# Altium PCB Power_Board_DRV8323.PcbDoc
Units mil, origin at the board's own origin, x right, y up, seen from the top; angles counter-clockwise.
Board outline 2748.03 x 2216.54 mil, 2 copper layers (Top Layer, Bottom Layer); 61 components, 46 nets, 232 pads, 128 vias.
Unrouted connection lines stored in the file: 44.
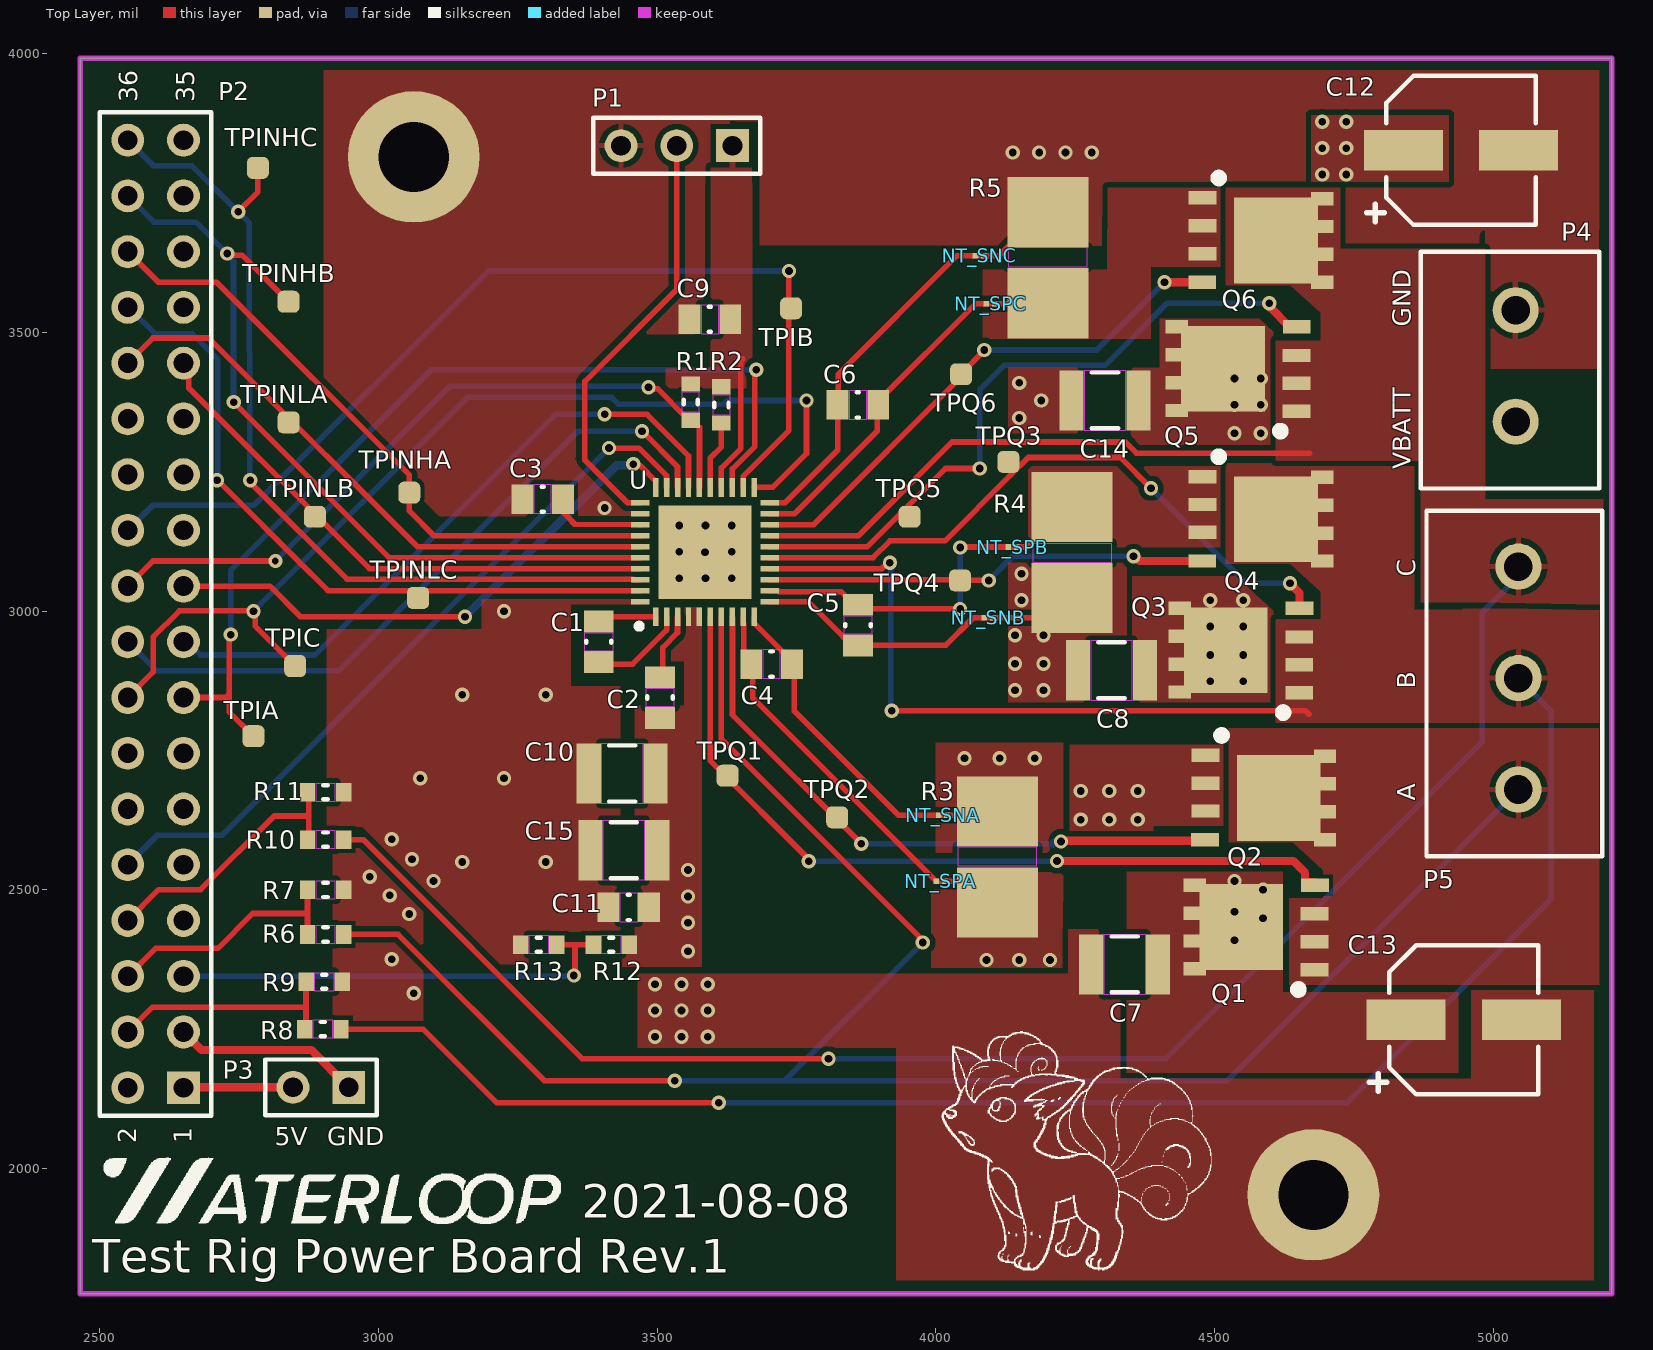
[diagram p0: Top Layer view]
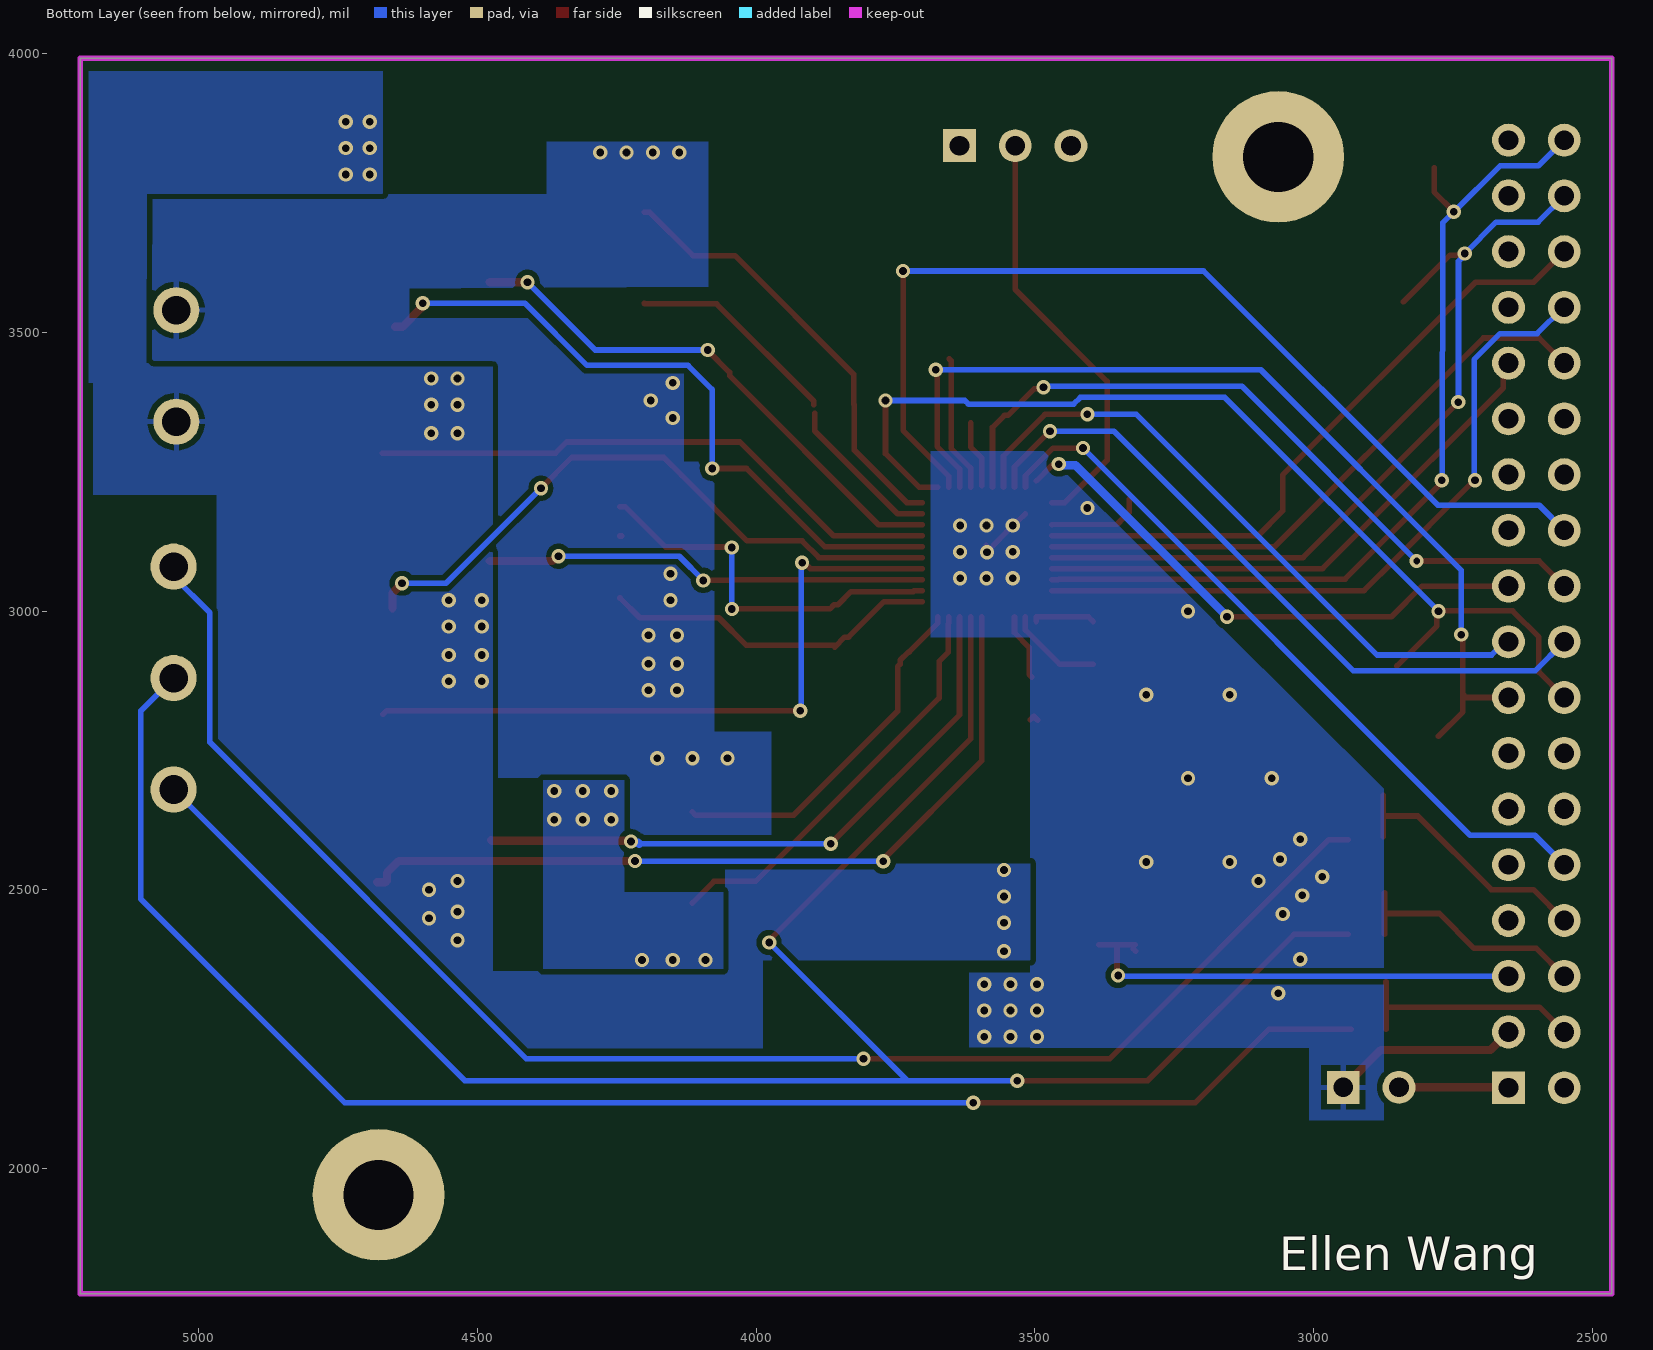
[diagram p1: Bottom Layer view, seen from below]
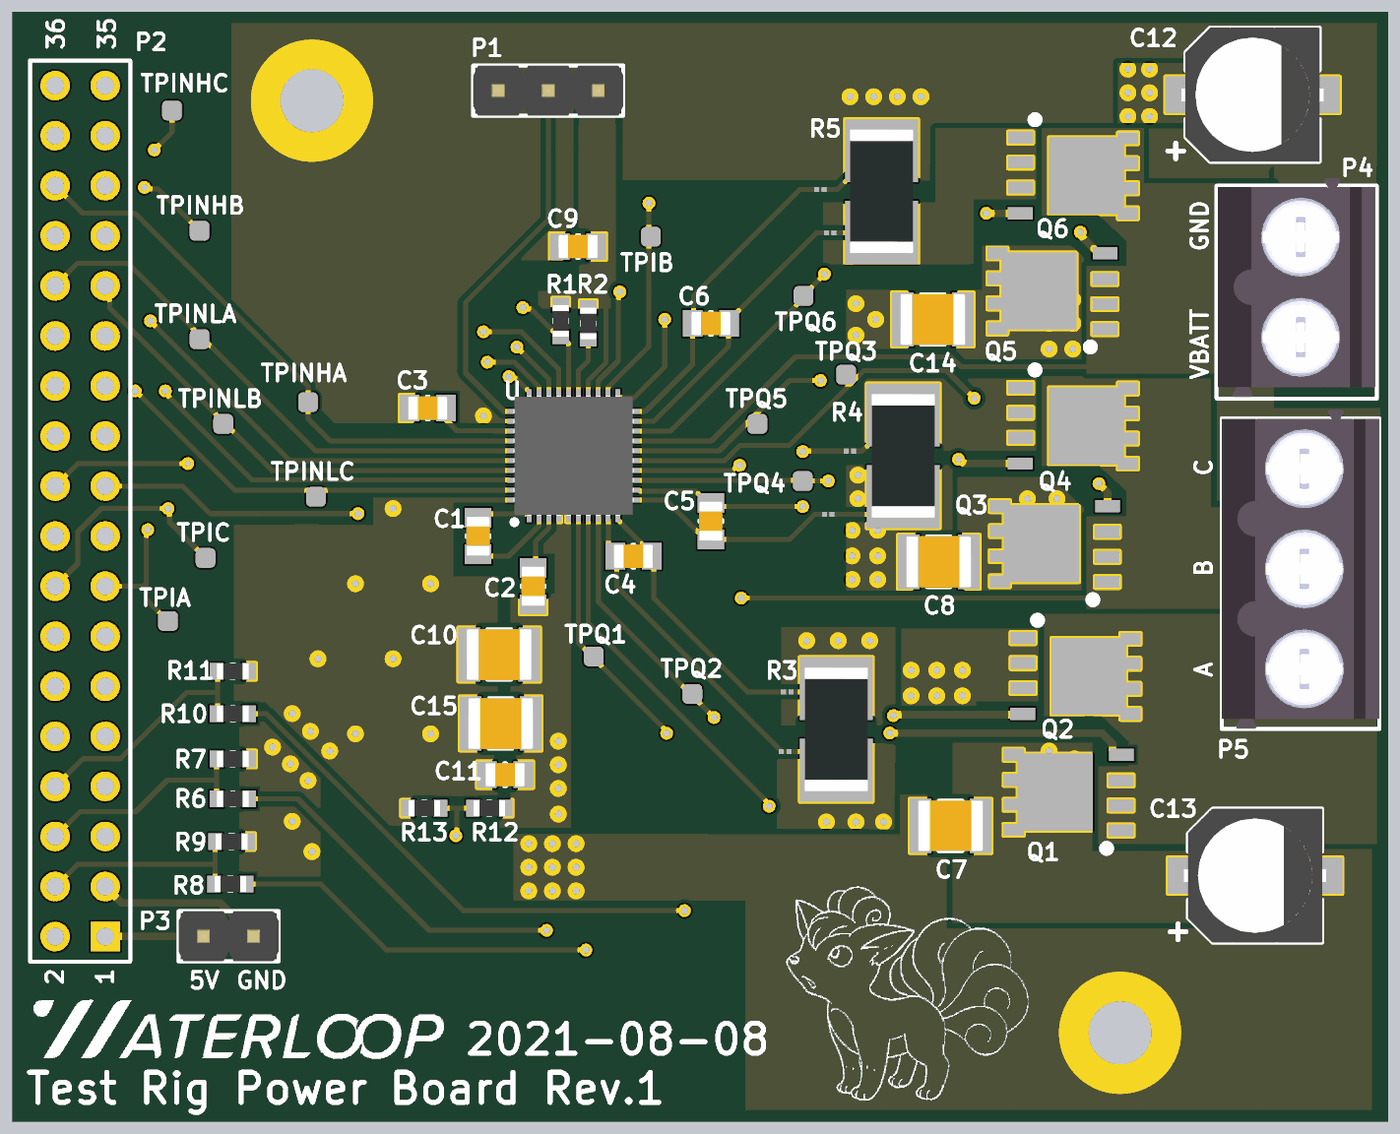
[diagram p2: 3D render of the assembled board from above, using the file's embedded part models]

## Layer stack, top to bottom
Top Solder: solder mask 0.4, Solder Resist, Dk 3.5
Top Layer: signal copper 1.4
Dielectric 1: dielectric 12.6, FR-4, Dk 4.8
Bottom Layer: signal copper 1.4
Bottom Solder: solder mask 0.4, Solder Resist, Dk 3.5

## Board outline
2464.57,1775.59 2464.57,3992.13 5212.6,3992.13 5212.6,1775.59

## Design rules (kind name [scope] priority, off if disabled: settings)
Clearance [All] p1: gap=10 ignorepadtopadclearanceinfootprint=FALSE except(0: Arc-Hole Track-Hole SMDPad-Hole THPad-Hole Via-Hole Fill-Hole Poly-Hole Region-Hole Text-Hole; 5: Arc-Arc Arc-Track Track-Track SMDPad-SMDPad; 7.87: Arc-SMDPad Track-SMDPad SMDPad-Fill SMDPad-Poly SMDPad-Region)
PolygonConnect PolygonConnect_11 [All vs IsNamedPolygon('GND_L02_P186')] p1: connectstyle=Direct reliefconductorwidth=10 reliefentries=4 polygonreliefangle="90 Angle" airgapwidth=10
PolygonConnect PolygonConnect_10 [All vs IsNamedPolygon('Bottom Layer-GND')] p2: connectstyle=Direct reliefconductorwidth=10 reliefentries=4 polygonreliefangle="90 Angle" airgapwidth=10
PolygonConnect PolygonConnect_9 [All vs IsNamedPolygon('VBATT_L02_P184')] p3: connectstyle=Direct reliefconductorwidth=10 reliefentries=4 polygonreliefangle="90 Angle" airgapwidth=10
PolygonConnect PolygonConnect_8 [All vs IsNamedPolygon('GND_L02_P183')] p4: connectstyle=Direct reliefconductorwidth=10 reliefentries=4 polygonreliefangle="90 Angle" airgapwidth=10
PolygonConnect PolygonConnect_7 [All vs IsNamedPolygon('GND_L01_P180')] p5: connectstyle=Direct reliefconductorwidth=10 reliefentries=4 polygonreliefangle="90 Angle" airgapwidth=10
PolygonConnect PolygonConnect_6 [All vs IsNamedPolygon('GND_L02_P181')] p6: connectstyle=Direct reliefconductorwidth=10 reliefentries=4 polygonreliefangle="90 Angle" airgapwidth=10
PolygonConnect PolygonConnect_5 [All vs IsNamedPolygon('NETNT_SPA_2_L02_P179')] p7: connectstyle=Direct reliefconductorwidth=10 reliefentries=4 polygonreliefangle="90 Angle" airgapwidth=10
PolygonConnect PolygonConnect_4 [All vs IsNamedPolygon('GND_L02_P177')] p8: connectstyle=Direct reliefconductorwidth=10 reliefentries=4 polygonreliefangle="90 Angle" airgapwidth=10
PolygonConnect PolygonConnect_3 [All vs IsNamedPolygon('NETNT_SPA_2_L01_P178')] p9: connectstyle=Direct reliefconductorwidth=10 reliefentries=4 polygonreliefangle="90 Angle" airgapwidth=10
PolygonConnect PolygonConnect_2 [All vs IsNamedPolygon('VBATT_L01_P178')] p10: connectstyle=Direct reliefconductorwidth=10 reliefentries=4 polygonreliefangle="90 Angle" airgapwidth=10
PolygonConnect PolygonConnect_1 [All vs IsNamedPolygon('3V3_L01_P174') Or IsNamedPolygon('GND_L01_P151') Or IsNamedPolygon('GND_L01_P155') Or IsNamedPolygon('GND_L01_P159') Or IsNamedPolygon('GND_L01_P163') Or IsNamedPolygon('GND_L01_P173') Or IsNamedPolygon('NETNT_SPA_2_L01_P156') Or IsNamedPolygon('NETNT_SPB_2_L01_P152') Or IsNamedPolygon('NETNT_SPC_2_L01_P148') Or IsNamedPolygon('PHASE_A_L01_P157') Or IsNamedPolygon('PHASE_B_L01_P153') Or IsNamedPolygon('PHASE_C_L01_P149') Or IsNamedPolygon('SPB_L01_P113') Or IsNamedPolygon('Top Layer-GND') Or IsNamedPolygon('Top Layer-GND 1') Or IsNamedPolygon('Top Layer-VBATT') Or IsNamedPolygon('Top Layer-VBATT 1') Or IsNamedPolygon('VBATT_L01_P150') Or IsNamedPolygon('VBATT_L01_P154') Or IsNamedPolygon('VBATT_L01_P162') Or IsNamedPolygon('VBATT_L01_P172') Or IsNamedPolygon('GND_L02_P177') Or IsNamedPolygon('VBATT_L02_P176')] p11: connectstyle=Direct reliefconductorwidth=10 reliefentries=4 polygonreliefangle="90 Angle" airgapwidth=10
PolygonConnect [All] p12: connectstyle=Relief reliefconductorwidth=10 reliefentries=4 polygonreliefangle="90 Angle" airgapwidth=10
RoutingVias [All] p1: holewidth=19.68 width=39.37 viastyle="Through Hole" minholewidth=7.87 minwidth=23.62 maxholewidth=28 maxwidth=50
SilkToSolderMaskClearance [IsPad] p1: minsilkscreentomaskgap=5.91 clearancetoexposedcopper=TRUE
SolderMaskExpansion [All] p1: expansion=4 istentingtop=FALSE
Width [All] p1: maxlimit=15 minlimit=10 preferedwidth=15 toplayer_prefwidth=10 minimp=50.000000 maximp=50.000000 favimp=50.000000
29 further rules are at their usual default settings.

## Components (designator, comment, footprint, x,y, rotation, side; value= is the part's Value field where it differs from the comment)
C1 "Capacitor - Nonpolarized" "0805 - CAPACITOR"#1 3395,2945 r90 top value=47nF
C2 "Capacitor - Nonpolarized" "0805 - CAPACITOR"#1 3505,2845 r270 top value=1uF
C3 "Capacitor - Nonpolarized" "0805 - CAPACITOR"#1 3294.29,3200.79 r0 top value=1uF
C4 "Capacitor - Nonpolarized" "0805 - CAPACITOR"#1 3705,2905 r180 top value=1nF
C5 "Capacitor - Nonpolarized" "0805 - CAPACITOR"#1 3860,2975 r90 top value=1nF
C6 "Capacitor - Nonpolarized" "0805 - CAPACITOR"#1 3860,3370 r0 top value=1nF
C7 "Capacitor - Nonpolarized" "1210 - Capacitor" 4338.58,2366.14 r180 top value=4.7uF
C8 "Capacitor - Nonpolarized" "1210 - Capacitor" 4314.96,2893.7 r0 top value=4.7uF
C9 "Capacitor - Nonpolarized" "0805 - CAPACITOR"#1 3594.49,3523.62 r180 top value=0.1uF
C10 "Capacitor - Nonpolarized" "1210 - Capacitor" 3437.01,2708.66 r180 top value=4.7uF
C11 "Capacitor - Nonpolarized" "0805 - CAPACITOR"#2 3448.82,2468.5 r180 top value=0.1uF
C12 "Capacitor - Polarized" "OCVZ0606 - CAPACITOR" 4941.93,3826.77 r0 top value=330uF
C13 "Capacitor - Polarized" "OCVZ0606 - CAPACITOR" 4946.75,2266.78 r0 top value=330uF
C14 "Capacitor - Nonpolarized" "1210 - Capacitor" 4303.15,3377.95 r0 top value=4.7uF
C15 "Capacitor - Nonpolarized" "1210 - Capacitor" 3439.96,2570.87 r0 top value=4.7uF
NT_SNA "NetTie" "Net Tie" 4004.68,2633.86 r90 top net-tie
NT_SNB "NetTie" "NET TIE" 4086.61,2988.19 r90 top net-tie
NT_SNC "NetTie" "NET TIE" 4070.87,3637.8 r90 top net-tie
NT_SPA "NetTie" "NET TIE" 4000.72,2515.03 r90 top net-tie
NT_SPB "NetTie" "Net Tie" 4130,3115 r90 top net-tie
NT_SPC "NetTie" "Net Tie" 4090.55,3551.18 r90 top net-tie
P1 "1x3 Header" HDR1X3 3635,3835 r180 top
P2 "Header 18X2" HDR2X18 2650,2145 r90 top
P3 "1x2 Header" HDR1X2 2946.46,2145.67 r180 top
P4 "1760510000" 1760510000 5040,3340 r90 top
P5 "1760520000" 1760520000 5045,2680 r90 top
Q1 "MOSFET-N" "POWERPAK® SO-8" 4679.72,2508.27 r180 top
Q2 "MOSFET-N" "POWERPAK® SO-8" 4482.72,2590 r0 top
Q3 "MOSFET-N" "POWERPAK® SO-8" 4652.28,3005 r180 top
Q4 "MOSFET-N" "POWERPAK® SO-8" 4477.72,3090 r0 top
Q5 "MOSFET-N" "POWERPAK® SO-8" 4647.28,3510 r180 top
Q6 "MOSFET-N" "POWERPAK® SO-8" 4477.72,3590 r0 top
R1 "Resistor" "0603 - RESISTOR" 3560,3375 r90 top value=4.7k
R2 "Resistor" "0603 - RESISTOR" 3615,3370 r90 top value=4.7k
R3 "Resistor" "2512 - RESISTOR" 4110.24,2559.06 r270 top value=1m
R4 "Resistor" "2512 - RESISTOR" 4244.09,3105.31 r90 top value=1m
R5 "Resistor" "2512 - RESISTOR" 4200.79,3633.86 r270 top value=1m
R6 "Resistor" "0603 - RESISTOR" 2905,2420 r180 top value=91k
R7 "Resistor" "0603 - RESISTOR" 2905,2500 r0 top value=5.6k
R8 "Resistor" "0603 - RESISTOR" 2900,2250 r180 top value=91k
R9 "Resistor" "0603 - RESISTOR" 2902.52,2335 r0 top value=5.6k
R10 "Resistor" "0603 - RESISTOR" 2905,2590 r180 top value=91k
R11 "Resistor" "0603 - RESISTOR" 2905,2675 r0 top value=5.6k
R12 "Resistor" "0603 - RESISTOR" 3417.32,2401.57 r180 top value=91k
R13 "Resistor" "0603 - RESISTOR" 3287.4,2401.57 r180 top value=5.6k
TPIA "Test Point" "Test Point"#1 2775.59,2775.59 r90 top
TPIB "Test Point" "Test Point"#1 3740.16,3543.31 r90 top
TPIC "Test Point" "Test Point"#1 2850.39,2901.57 r90 top
TPINHA "Test Point" "Test Point"#1 3055.12,3212.6 r90 top
TPINHB "Test Point" "Test Point"#1 2838.58,3555.12 r90 top
TPINHC "Test Point" "Test Point"#2 2783.46,3809.72 r90 top
TPINLA "Test Point" "Test Point"#1 2838.58,3338.58 r90 top
TPINLB "Test Point" "Test Point"#1 2885.83,3169.29 r90 top
TPINLC "Test Point" "Test Point"#1 3070.87,3023.62 r90 top
TPQ1 "Test Point" "Test Point"#1 3625.98,2704.72 r90 top
TPQ2 "Test Point" "Test Point"#1 3822.83,2629.92 r90 top
TPQ3 "Test Point" "Test Point"#1 4129.92,3267.72 r90 top
TPQ4 "Test Point" "Test Point"#1 4043.31,3055.12 r90 top
TPQ5 "Test Point" "Test Point"#1 3952.76,3169.29 r90 top
TPQ6 "Test Point" "Test Point"#1 4045,3425 r90 top
U "DRV8323SRTAT" DRV8323SRTAT 3585.55,3105.79 r90 top

## Footprints (in the part's own frame and the unit in brackets; to place one, negate y for a bottom-side part, rotate by r counter-clockwise, add the part's x,y. Pads: shape width x height; smd on the part's side, far side on the other; paste and mask are expansions set on the pad)
"0603 - RESISTOR" [mm] "0603 Chip Resistor - IPC Medium Density"
  rect 0.7x0.85 smd: 1(-0.825,0) 2(0.825,0)
  Top Layer keep-out region: -0.45,0.4 -0.45,-0.4 0.45,-0.4 0.45,0.4
  silkscreen extent -0.1,-0.33 0.1,0.33, body extent -0.8,-0.4 0.8,0.4, height 0.45
"0805 - CAPACITOR"#1 [mm] "0805 Chip Capacitor - IPC Medium Density"
  rect 1x1.35 smd: 1(-0.925,0) 2(0.925,0)
  Top Layer keep-out region: -0.4,0.65 -0.4,-0.65 0.4,-0.65 0.4,0.65
  silkscreen extent -0.05,-0.58 0.05,0.58, body extent -1,-0.6 1,0.6, height 1.2
"0805 - CAPACITOR"#2 [mm] "0805 Chip Capacitor - IPC Medium Density"
  rect 1x1.35 smd: 2(0.925,0) ""(-0.925,0)
  Top Layer keep-out region: -0.4,0.65 -0.4,-0.65 0.4,-0.65 0.4,0.65
  silkscreen extent -0.05,-0.58 0.05,0.58, body extent -1,-0.6 1,0.6, height 1.2
"1210 - Capacitor" [mm] "1210 Chip Capacitor - IPC Medium Density"
  rect 1.1x2.75 smd: 1(-1.525,0) 2(1.525,0)
  Top Layer keep-out region: -0.95,1.35 -0.95,-1.35 0.95,-1.35 0.95,1.35
  silkscreen extent -0.6,-1.27 0.6,1.28, body extent -1.65,-1.3 1.65,1.3, height 1.6
"2512 - RESISTOR" [mm]
  rect 3.2x3.7 smd: 1(-2.075,0) 2(2.075,0)
  Top Layer keep-out region: -0.45,1.8 -0.45,-1.8 0.4,-1.8 0.4,1.8
  body extent -3.15,-1.6 3.15,1.6, height 0.6
1760510000 [mm] "5.08mm pitch screw connector"
  round 2.1 hole 1.3: 1(0,0) 2(5.08,0)
  silkscreen extent -3.05,-3.81 7.75,4.32, body extent -2.98,-3.75 8.13,4.25, height 10
1760520000 [mm] "5.08mm pitch screw connector"
  round 2.1 hole 1.3: 1(0,0) 2(5.08,0) 3(10.16,0)
  silkscreen extent -3.05,-3.81 12.7,4.19, body extent -3.05,-3.81 13.14,4.19, height 10
DRV8323SRTAT [mm]
  rect 0.85x0.25 smd: 1(-2.95,2.25) 2(-2.95,1.75) 3(-2.95,1.25) 4(-2.95,0.75) 5(-2.95,0.25) 6(-2.95,-0.25) 7(-2.95,-0.75) 8(-2.95,-1.25) 9(-2.95,-1.75) 10(-2.95,-2.25) 21(2.95,-2.25) 22(2.95,-1.75) 23(2.95,-1.25) 24(2.95,-0.75) 25(2.95,-0.25) 26(2.95,0.25) 27(2.95,0.75) 28(2.95,1.25) 29(2.95,1.75) 30(2.95,2.25)
  rect 0.25x0.85 smd: 11(-2.25,-2.95) 12(-1.75,-2.95) 13(-1.25,-2.95) 14(-0.75,-2.95) 15(-0.25,-2.95) 16(0.25,-2.95) 17(0.75,-2.95) 18(1.25,-2.95) 19(1.75,-2.95) 20(2.25,-2.95) 31(2.25,2.95) 32(1.75,2.95) 33(1.25,2.95) 34(0.75,2.95) 35(0.25,2.95) 36(-0.25,2.95) 37(-0.75,2.95) 38(-1.25,2.95) 39(-1.75,2.95) 40(-2.25,2.95)
  rect 4.25x4.25 smd: 41(0,0)
  silkscreen extent -3.5,2.87 -3.25,3.12, body extent -3.05,-3.05 3.05,3.05, height 0.8
HDR1X2 [mm] "Connector; Header; 2 Position"
  rect 1.5x1.5 hole 0.9: 1(0,0)
  round 1.5 hole 0.9: 2(2.54,0)
  silkscreen extent -1.27,-1.27 3.81,1.27, body extent -1.27,-1.27 3.81,1.27, height 8.54
HDR1X3 [mm] "Connector; Header; 3 Position"
  rect 1.5x1.5 hole 0.9: 1(0,0)
  round 1.5 hole 0.9: 2(2.54,0) 3(5.08,0)
  silkscreen extent -1.27,-1.27 6.35,1.27, body extent -1.27,-1.27 6.35,1.27, height 8.54
HDR2X18 [mm] "Connector; Header; 18x2 Position"
  rect 1.5x1.5 hole 0.9: 1(0,0)
  round 1.5 hole 0.9: 2(0,2.54) 3(2.54,0) 4(2.54,2.54) 5(5.08,0) 6(5.08,2.54) 7(7.62,0) 8(7.62,2.54) 9(10.16,0) 10(10.16,2.54) 11(12.7,0) 12(12.7,2.54) 13(15.24,0) 14(15.24,2.54) 15(17.78,0) 16(17.78,2.54) 17(20.32,0) 18(20.32,2.54) 19(22.86,0) 20(22.86,2.54) 21(25.4,0) 22(25.4,2.54) 23(27.94,0) 24(27.94,2.54) 25(30.48,0) 26(30.48,2.54) 27(33.02,0) 28(33.02,2.54) 29(35.56,0) 30(35.56,2.54) 31(38.1,0) 32(38.1,2.54) 33(40.64,0) 34(40.64,2.54) 35(43.18,0) 36(43.18,2.54)
  silkscreen extent -1.27,-1.27 44.45,3.81
"Net Tie" [mil] "General Net TIe"
  rect 10x10 smd mask+0: 1(0,0) 2(0,-15)
  Top Layer lines w10: 0,0 0,-15
"NET TIE" [mil] "General Net TIe"
  rect 10x10 smd mask+0: 1(0,0) 2(0,-15)
  Top Layer lines w10: 0,0 0,-15
"OCVZ0606 - CAPACITOR" [mm] "Aluminum Electrolytic Capacitor, Body 6.60x6.60x6.00mm, IPC Low Density"
  rect 3.6x1.85 smd: 1(-2.625,0) 2(2.625,0)
  silkscreen extent -4.3,-3.4 3.4,3.4, body extent -3.6,-3.4 3.6,3.4, height 6
"POWERPAK® SO-8" [mm]
  rect 1.27x0.61 smd: 1(0,0) 3(0.017,3.845) 3(0.017,2.575) 3(0.017,1.305)
  rect 3.81x3.91 smd: 2(3.36,1.905)
  rect 1.02x0.61 smd: 2(5.465,3.81) 2(5.465,0) 2(5.465,0) 2(5.465,1.27) 2(5.465,2.54)
  silkscreen extent 0.57,4.57 0.93,4.93
"Test Point"#1 [mm] "Test Point"
  rrect50% 1x1 smd: 1(0,0)
"Test Point"#2 [mm] "Test Point"
  rrect50% 1x1 smd: 1(-0.367,0)

## Part data
C1: "Nonpolarized Capacitor", Manufacturer=YAGEO, Manufacturer Part Number=CC0805KKX7R0BB473, Rating=100V, Supplier Part Number=311-1876-1-ND, Supplier=Digikey
C2 C3: "Nonpolarized Capacitor", Manufacturer=YAGEO, Manufacturer Part Number=CC0805KKX7R7BB105, Rating=16V, Supplier Part Number=311-1365-1-ND, Supplier=Digikey
C4 C5 C6: "Nonpolarized Capacitor", Manufacturer=YAGEO, Manufacturer Part Number=CC0805KRX7R0BB102, Rating=100V, Supplier Part Number=311-1472-1-ND, Supplier=Digikey
C7 C8 C10 C14 C15: "Nonpolarized Capacitor", Manufacturer="Taiyo Yuden", Manufacturer Part Number=HMK325C7475KN-TE, Rating=100V, Supplier Part Number=587-5038-1-ND, Supplier=Digikey
C9 C11: "Nonpolarized Capacitor", Manufacturer="Samsung Electro-Mechanics", Manufacturer Part Number=CL21B104KCFWPNE, Rating=100V, Supplier Part Number=1276-6733-1-ND, Supplier=Digikey
C12 C13: "Polarized Capacitor", Rating=100V
NT_SNA NT_SNB NT_SNC NT_SPA NT_SPB NT_SPC: library part "Net Tie"
P1: "1x3 Pin Header"
P2: "Header, 18-Pin, Dual row", LatestRevisionDate=17-Jul-2002, LatestRevisionNote="Re-released for DXP Platform.", Publisher="Altium Limited"
P3: "1x2 Pin Header"
P4: "1x2 Screw Terminal Block", Manufacturer=Weidmüller, Supplier Part Number=281-1882-ND, ComponentLink1Description=Datasheet, ComponentLink1URL=https://media.digikey.com/pdf/Data%20Sheets/Weidmuller%20PDFs/1760510000.pdf, Manufacturer Part Number=1760510000, Supplier=Digikey
P5: "1x3 Screw Terminal Block", Manufacturer=Weidmüller, Supplier Part Number=281-1883-ND, ComponentLink1Description=Datasheet, ComponentLink1URL=https://media.digikey.com/pdf/Data%20Sheets/Weidmuller%20PDFs/1760520000.pdf, Manufacturer Part Number=1760520000, Supplier=Digikey
Q1 Q2 Q3 Q4 Q5 Q6: "N-Channel MOSFET", Rating=100V, Supplier Part Number=SiR846DP
R1 R2: Manufacturer=YAGEO, Manufacturer Part Number=RC0603FR-074K7L, Supplier Part Number=311-4.70KHRCT-ND, Supplier=Digikey
R3 R4 R5: Manufacturer=Riedon, Manufacturer Part Number=CSR2512C0R001F, Rating=3W, Supplier Part Number=696-1185-1-ND, Tolerance=1%, Supplier=Digikey
R6 R8 R10 R12: Manufacturer=YAGEO, Manufacturer Part Number=RC0603FR-0791KL, Supplier Part Number=311-91.0KHRCT-ND, Tolerance=1%, Supplier=Digikey
R7 R9 R11 R13: Manufacturer=YAGEO, Manufacturer Part Number=RC0603FR-075K6L, Supplier Part Number=311-5.60KHRCT-ND, Tolerance=1%, Supplier=Digikey
U: "Multiphase Motor Driver Power MOSFET SPI", Manufacturer="Texas Instruments", Supplier Part Number=296-47095-1-ND, ComponentLink1Description=Datasheet, ComponentLink1URL=https://www.ti.com/lit/ds/symlink/drv8323.pdf?HQS=dis-dk-null-digikeymode-dsf-pf-null-wwe&ts=1623708117864, Manufacturer Part Number=DRV8323SRTAT, Supplier=Digikey

## Free pads (board coordinates)
  round 236.22 hole 125.98: 4(3062.99,3814.96) 4(4677.17,1952.76)

## Via types
v1: diameter 25.59, hole 13.78, Top Layer to Bottom Layer, 127 vias
v2: diameter 25.59, hole 11.81, Top Layer to Bottom Layer, 1 vias

## Nets (pads, with @x,y where several pads share a name; then routed paths per layer and width w, separated by ;. In a path a pad name is that pad's centre, name@x,y a point inside that pad or via, vN(x,y) a via of type N, cw(c..) or ccw(c..) an arc to the next point about the centre after c; other vN are vias at no path point)
3V3: C9.1 P1.1 R1.2 R2.2 U.24 | length 246.8
  Top Layer w10: U.24 3615.08,3256.87 3650,3291.79 3650,3449.21 3653.54,3452.76
5V: P2.1 P3.2 | length 195.8
  Top Layer w15: P2.1@2650.67,2145.67 P3.2
CAL: P1.2 U.31 | length 763.7
  Top Layer w10: U.31 3446.32,3194.37 3370,3270.69 3370,3412.1 3535,3577.1 P1.2
CS_DRIVER: P2.10 U.29 | length 1318
  Top Layer w10: v1(3413.39,3292.54) 3467.24,3292.54 3516.57,3243.21 3516.57,3222.01 U.29
  Bottom Layer w10: P2.10 2602.97,2597.97 2718.82,2597.97 v1(3413.39,3292.54)
DVDD: C3.2 U.33 | length 171.2
  Top Layer w10: C3.2 3330.54,3177.57 3351.94,3155.86 U.33
EN: P2.19 U.30 | length 995.6
  Top Layer w10: P2.19 2805,3045 2860,2990 v1(3155,2990) ; v1(3456.69,3263.78) 3459.68,3260.8 3469.75,3260.8 U.30@3496.89,3233.66
  Bottom Layer w15: v1(3155,2990) 3426.75,3261.75 3454.67,3261.75 v1(3456.69,3263.78)
GHA: Q1.1 TPQ1.1 U.6 | length 1442.8
  Top Layer w10: U.6 3595.39,2731.38 v1@3773.62,2553.15
  Top Layer w15: v1(4217.13,2551.78) 4641.11,2551.78 4662.03,2530.86 4662.03,2516.52 4665.18,2513.36 Q1.1@4679.53,2513.36
  Bottom Layer w10: v1@3771.95,2551.48 v1@4216.83,2551.48
  Bottom Layer w15: v1(3771.65,2551.18) v1@3771.95,2551.48 ; v1@4216.83,2551.48 v1(4217.13,2551.78)
GHB: Q3.1 TPQ3.1 U.15 | length 1153.3
  Top Layer w10: U.15 3887.28,3095.94 3917.32,3125.98 3966.65,3125.98 4015.98,3125.98 4133.98,3243.98 4165.59,3275.59 4330.71,3275.59 v1(4385.83,3220.47)
  Top Layer w15: v1(4635,3050) 4652.28,3032.72 Q3.1
  Bottom Layer w10: v1(4385.83,3220.47) 4556.3,3050 v1(4635,3050)
GHC: Q5.1 TPQ5.1 U.16 | length 1230.4
  Top Layer w10: U.16 3876.84,3115.63 3931.65,3170.44 3941.63,3180.42 3946.52,3185.31 4017.11,3255.91 v1(4078.74,3255.91)
  Top Layer w15: v1(4597.8,3552.31) 4599.82,3550.29 4599.82,3544.47 4634.29,3510 Q5.1
  Bottom Layer w10: v1(4078.74,3255.91) 4078.74,3397.64 4122.05,3440.94 4303.15,3440.94 4414.52,3552.31 v1(4597.8,3552.31)
GLA: Q2.1 TPQ2.1 U.8 | length 1114
  Top Layer w10: U.8 cw(c3625,2987.49) 3635,2987.49 3635,2813.82 v1(3866.14,2582.68)
  Top Layer w15: v1(4224.41,2586.61) 4226.1,2588.31 4474.26,2588.31 Q2.1@4474.83,2588.88
  Bottom Layer w10: v1(3866.14,2582.68) 4209.73,2582.68
  Bottom Layer w15: 4209.73,2582.68 4211.64,2584.59 4222.38,2584.59 v1(4224.41,2586.61)
GLB: Q4.1 TPQ4.1 U.13 | length 798.1
  Top Layer w10: U.13 4043.31,3056.57 4044.76,3055.12 v1(4094.49,3055.12)
  Top Layer w15: v1(4354.33,3098.43) 4357.2,3098.43 4365.62,3090 Q4.1
  Bottom Layer w10: v1(4094.49,3055.12) 4137.8,3098.43 v1(4354.33,3098.43)
GLC: Q6.1 TPQ6.1 U.18 | length 960.2
  Top Layer w10: U.18 3780,3155 4047.5,3422.5 4047.5,3428.44 4086.61,3467.56 v1(4086.61,3468.5)
  Top Layer w15: v1(4410,3590) Q6.1
  Bottom Layer w10: v1(4086.61,3468.5) 4288.5,3468.5 v1(4410,3590)
GND: C3.1 C7.2 C8.1 C9.2 C10.2 C11.2 C12.2 C13.2 C14.1 C15.1 NT_SNA.2 NT_SNB.2 NT_SNC.2 P1.3 P2.3 P3.1 P4.2 pad.4 R3.1 R4.1 R5.1 R7.2 R9.2 R11.2 R13.2 U.32 U.40 U.41 | length 848.7
  Top Layer w10: U.41@3516.65,3174.68 v1(3539.37,3153.54) v1(3585.55,3105.79) U.41@3586.61,3118.11 ; NT_SNA.2 4108.27,2633.86 R3.1@4114.17,2639.76 ; NT_SNC.2 4113.19,3637.8 4190.94,3715.55 R5.1 ; NT_SNB.2 4208.66,2988.19 R4.1
  Top Layer w15: P2.3 2682.4,2212.6 2879.53,2212.6 P3.1
  other v1: 3496.06,2236.22 3543.31,2236.22 3590.55,2236.22 3496.06,2283.46 3543.31,2283.46 3590.55,2283.46 3062.99,2314.7 3496.06,2330.71 3543.31,2330.71 3590.55,2330.71 3023.62,2375.3 3055.12,2456.69 3020,2490 3098.43,2515.75 2984.25,2523.62 3150,2550 3300,2550 3060,2555 3023.62,2590.55 3075,2700 3225,2700 4051.18,2736.22 4114.17,2736.22 4177.17,2736.22 3150,2850 3300,2850 4141.73,2858.27 4192.91,2858.27 4141.73,2905.51 4192.91,2905.51 4141.73,2956.69 4192.91,2956.69 3225,3000 4153.54,3019.68 3539.21,3058.9 3586.61,3059.06 3633.86,3059.06 4153.54,3066.93 3539.37,3106.3 3633.86,3106.3 3586.61,3153.54 3633.86,3153.54 3405.51,3185.04 4149.61,3346.46 4188.98,3377.95 4149.61,3409.45 4137.8,3822.83 4185.04,3822.83 4232.28,3822.83 4279.53,3822.83
INHA: P2.32 TPINHA.1 U.34 | length 1168.1
  Top Layer w10: P2.32 2605,3590 2709.21,3590 3055.12,3244.09 TPINHA.1 3055.12,3179.88 3099.69,3135.32 U.34
INHB: P2.34 TPINHB.1 U.36 | length 1484
  Top Layer w10: v1(2728.35,3641.73) 2731.33,3638.75 2754.95,3638.75 TPINHB.1 ; v1(2740.3,3375) 2740.3,3374.41 3018.76,3095.94 U.36
  Bottom Layer w10: P2.34 2597.03,3697.97 2672.11,3697.97 v1(2728.35,3641.73) ; v1@2728.35,3639.01 2739.7,3627.65 2739.7,3375.59 v1(2740.3,3375)
  Bottom Layer w15: v1@2728.35,3639.01 v1(2728.35,3641.73)
INHC: P2.36 TPINHC.1 U.38 | length 1611.9
  Top Layer w10: v1(2748.03,3716.54) 2783.46,3751.97 TPINHC.1 ; v1(2770,3235) 2770,3230.78 2777.43,3223.35 2777.43,3223.12 2942.99,3057.56 3456.77,3057.56 3457.76,3056.57 U.38
  Bottom Layer w10: P2.36 2596.19,3799.12 2664.63,3799.36 v1(2748.03,3716.54) 2767.66,3697.04 2769.26,3235 2769.26,3234.25 v1(2770,3235)
INLA: P2.28 TPINLA.1 U.35 | length 1093.1
  Top Layer w10: P2.28 2595,3490 2695,3490 2740,3445 3069.37,3115.63 U.35
INLB: P2.27 TPINLB.1 U.37 | length 992.6
  Top Layer w10: P2.27 2659.39,3435.61 2659.39,3400.61 2920,3140 2983.74,3076.26 U.37
INLC: P2.30 TPINLC.1 U.39 | length 1259
  Top Layer w10: v1(2710,3235) 2711.25,3234.96 2872.85,3073.37 2888.46,3057.75 2909.32,3036.89 3031.5,3036.89 3122.05,3036.89 U.39
  Bottom Layer w10: P2.30 2551.62,3545 2598.72,3497.9 2665.23,3497.9 2711.69,3451.44 2711.69,3236.69 v1(2710,3235)
NetC1_1: C1.1 U.2 | length 170.5
  Top Layer w10: C1.1@3395,2905 3455.54,2905 3516.65,2966.11 U.2
NetC1_2: C1.2 U.1 | length 113.6
  Top Layer w10: C1.2 3403.23,2989.65 U.1 3496.97,2981.5 U.1@3496.89,2981.42
NetC2_1: C2.1 U.3 | length 121.2
  Top Layer w10: C2.1 3510,2886.42 3510,2935 3536.34,2961.34 U.3
NetNT_SPA_2: NT_SPA.2 Q2.3 R3.2 | length 114.5
  Top Layer w10: NT_SPA.2 4075.52,2515.03 R3.2@4114.17,2476.38
  other v1: 4090.55,2374.02 4149.61,2374.02 4204.72,2374.02 4259.84,2625.98 4311.02,2625.98 4362.2,2625.98 4259.84,2677.17 4311.02,2677.17 4362.2,2677.17
NetNT_SPB_2: NT_SPB.2 Q4.3 R4.2 | length 131.9
  Top Layer w10: NT_SPB.2 4162.24,3115 4234.25,3187.01 R4.2 ; R4.2@4241.14,3134.84 R4.2@4244.09,3134.84
NetNT_SPC_2: NT_SPC.2 Q6.3 R5.2 | length 95.6
  Top Layer w10: NT_SPC.2 4199.8,3551.18 R5.2
NFAULT: R2.1 U.25 | length 121.1
  Top Layer w10: U.25@3595,3224.66 3595,3274.75 3615,3294.75 R2.1
PHASE_A: P5.1 Q1.3 Q2.2 R6.1 U.7 | length 3517.3
  Top Layer w10: R6.1 3035,2420 3297.52,2157.48 v1(3531.5,2157.48) ; U.7 3615.08,2770.75 3976.38,2409.45 v1(3976.38,2405.51)
  Bottom Layer w10: v1(3531.5,2157.48) 3728.35,2157.48 ; v1(3976.38,2405.51) 3728.35,2157.48 ; P5.1 4522.48,2157.48 3728.35,2157.48
PHASE_B: P5.2 Q3.3 Q4.2 R8.1 U.14 | length 4035.9
  Top Layer w10: R8.1 3080,2250 3211.89,2118.11 v1(3610.24,2118.11) ; U.14 3902.75,3076.26 3913.1,3086.61 v1(3917.32,3086.61) ; v1(3920.51,2821.32) 4662.97,2821.32 4669.29,2815
  Bottom Layer w10: v1(3610.24,2118.11) 4738.11,2118.11 5103.84,2483.84 5103.84,2821.16 P5.2 ; v1@3918.92,2822.92 v1@3918.92,3085.02
  Bottom Layer w15: v1(3917.32,3086.61) v1@3918.92,3085.02 ; v1@3918.92,2822.92 v1(3920.51,2821.32)
PHASE_C: P5.3 Q5.3 Q6.2 R10.1 U.17 | length 3829
  Top Layer w10: R10.1 2972.48,2590 3365.63,2196.85 v1(3807.09,2196.85) ; U.17 3861.01,3135.32 4029.08,3303.39 4339.7,3303.39 4359.62,3283.46 4670.23,3283.46
  Bottom Layer w10: v1(3807.09,2196.85) 4411.85,2196.85 4980,2765 4980,2997.37 5045,3062.37 P5.3
SCLK: P2.18 U.28 | length 1249.6
  Top Layer w10: v1(3472.44,3322.83) 3472.5,3322.83 3536.34,3259 U.28
  Bottom Layer w10: P2.18 2602.19,2892.81 2928.25,2892.81 3358.27,3322.83 v1(3472.44,3322.83)
SDI: P2.17 U.27 | length 1182.3
  Top Layer w10: v1(3405.51,3353.13) 3481.52,3353.13 3556.02,3278.62 U.27
  Bottom Layer w10: P2.17 2656.65,2945 2680.39,2921.26 2885.83,2921.26 3317.7,3353.13 v1(3405.51,3353.13)
SDO: P2.20 R1.1 U.26 | length 1312.5
  Top Layer w10: P2.20 2595,3090 v2(2815,3090) ; v1(3484.25,3401.57) 3487.24,3398.59 3500.98,3398.59 3548.27,3351.3 3554.17,3351.3 3575.71,3329.76 U.26
  Bottom Layer w10: v2(2815,3090) 3128.43,3403.43 3482.4,3403.43 v1(3484.25,3401.57)
SNA: C4.1 NT_SNA.1 U.10 | length 535.7
  Top Layer w10: U.10 3674.13,2977.99 3674.21,2977.91 3725.56,2926.57 3726.73,2926.57 3741.42,2911.89 C4.1 3745.94,2900.48 3745.94,2820.46 3932.54,2633.86 NT_SNA.1
SNB: C5.1 NT_SNB.1 U.11 | length 437.8
  Top Layer w10: U.11 3770.2,3017.2 3834.13,2953.27 3841.02,2953.27 C5.1@3858.58,2935.71 ; C5.1 4017.26,2938.58 4066.87,2988.19 NT_SNB.1
SNC: C6.1 NT_SNC.1 U.20 | length 631.9
  Top Layer w10: U.20 3729.37,3194.37 3823.58,3288.58 C6.1 3825,3371.42 3825,3425 4037.8,3637.8 NT_SNC.1
SOA: P2.15 TPIA.1 U.23 | length 1721.2
  Top Layer w10: P2.15 2726.16,2845 2732.02,2850.86 ; v1(2735,2957.91) 2732.02,2954.93 2732.02,2850.86 ; TPIA.1 2732.02,2819.16 2732.02,2850.86 ; U.23 3634.76,3255.34 3675,3295.58 v1@3675,3433.07
  Bottom Layer w10: v1(2735,2957.91) 2735,3073.58 3094.49,3433.07 v1(3677.8,3433.07)
SOB: P2.22 TPIB.1 U.22 | length 1801.1
  Top Layer w10: U.22 3654.45,3242.29 3674.24,3262.09 3736.22,3324.07 v1(3736.22,3610.24)
  Bottom Layer w10: P2.22 2594.89,3189.89 2776.86,3189.89 3197.2,3610.24 v1(3736.22,3610.24)
SOC: P2.16 TPIC.1 U.21 | length 1829.2
  Top Layer w10: P2.16 2595.47,2890.47 2595.47,2953.44 2642.5,3000.47 2775.12,3000.47 v1(2775.59,3000) 2778.57,2997.02 2778.57,2973.39 TPIC.1 ; U.21 3706.93,3221.93 3767.72,3282.72 v1(3767.72,3377.95)
  Bottom Layer w10: v1(2775.59,3000) 3159.02,3383.43 3418.06,3383.43 3430.21,3371.28 3618.88,3371.28 3625.55,3377.95 v1(3767.72,3377.95)
SPA: C4.2 NT_SPA.1 U.9 | length 618.1
  Top Layer w10: U.9 3654.45,2977.99 3655,2977.44 3655,2926.57 3671.57,2910 3671.57,2844.17 NT_SPA.1
SPB: C5.2 NT_SPB.1 U.12 | length 552.4
  Top Layer w10: U.12 3701.77,3036.81 3716.47,3036.81 3718.28,3035 3829.53,3035 3853.11,3011.42 C5.2 3867.48,3003.94 v1(4043.31,3003.94) ; v1(4043.39,3114.09) 4044.31,3115 NT_SPB.1
  Bottom Layer w10: v1@4043.35,3003.98 v1@4043.35,3114.04
  Bottom Layer w15: v1(4043.31,3003.94) v1@4043.35,3003.98 ; v1@4043.35,3114.04 v1(4043.39,3114.09)
SPC: C6.2 NT_SPC.1 U.19 | length 559.4
  Top Layer w10: U.19 3745.9,3174.68 3894.64,3323.43 ; 3894.64,3323.43 ccw(c3885,3326.09) 3895,3326.05 C6.2@3895,3355 ; C6.2 3896.42,3376.89 4070.71,3551.18 NT_SPC.1
VBATT: C2.2 C7.1 C8.2 C10.1 C11. C12.1 C13.1 C14.2 C15.2 P4.1 Q1.2 Q3.2 Q5.2 R12.1 U.4 U.5 | length 18.6
  Top Layer w10: C2.2@3494.57,2804.27 3501.7,2811.39 C2.2@3507.7,2805.39
  other v1: 3555.12,2389.76 4535.43,2409.45 3555.12,2440.94 4586.61,2448.82 4535.43,2460.63 3555.12,2488.19 4586.61,2500 4535.43,2515.75 3555.12,2535.43 4492.13,2874.02 4551.18,2874.02 4492.13,2921.26 4551.18,2921.26 4492.13,2972.44 4551.18,2972.44 4492.13,3019.68 4551.18,3019.68 4535.43,3318.9 4582.68,3318.9 4535.43,3370.08 4582.68,3370.08 4535.43,3417.32 4582.68,3417.32 4692.91,3783.46 4736.22,3783.46 4692.91,3830.71 4736.22,3830.71 4692.91,3877.95 4736.22,3877.95
VSENSE_A: P2.6 R6.2 R7.1 | length 444.1
  Top Layer w10: P2.6 2600,2395 2711.65,2395 2774.15,2457.5 2872.52,2457.5 ; R6.2 2872.52,2457.5 ; R7.1@2872.52,2495 2872.52,2457.5
VSENSE_B: P2.4 R8.2 R9.1 | length 424.4
  Top Layer w10: P2.4 2594.53,2289.53 2867.03,2289.53 2869.8,2286.75 ; R8.2@2869.8,2250 2869.8,2286.75 ; R9.1@2869.8,2335 2869.8,2286.75
VSENSE_C: P2.8 R10.2 R11.1 | length 477.5
  Top Layer w10: P2.8 2605.47,2500.47 2680.76,2500.47 2812.79,2632.5 2874.8,2632.5 ; R10.2@2874.8,2595 2874.8,2632.5 ; R11.1@2874.8,2670 2874.8,2632.5
VSENSE_VBATT: P2.5 R12.2 R13.1 | length 827.5
  Top Layer w10: R13.1@3318.9,2389.76 R13.1@3322.83,2393.7 ; R13.1 3352.36,2401.57 ; v1(3350.39,2346.46) 3352.36,2348.43 3352.36,2401.57 ; R12.2 3352.36,2401.57
  Bottom Layer w10: P2.5 3348.94,2345 v1(3350.39,2346.46)
pads on no net: P2.2 P2.7 P2.9 P2.11 P2.12 P2.13 P2.14 P2.21 P2.23 P2.24 P2.25 P2.26 P2.29 P2.31 P2.33 P2.35

## Polygon pours and split planes (outlines as drawn)
GND on Top Layer "GND_L01_P159" (solid, pour order 159): 3465,2350.39 4237.07,2349.52 4237.07,2429.49 4330.31,2429.49 4330.31,2161.42 4960.63,2161.42 4960.63,2319.72 5180,2320 5180,1799.21 3928.82,1799.21 3928.82,2216.54 3465,2216.54
GND on Top Layer "Top Layer-GND" (solid, pour order 175): 4995,3655 5190,3655 5190,3970 3690.19,3970 2901.57,3970 2901.57,3384.67 3108.41,3170 3278.54,3170 3278.54,3235 3358.27,3235 3358.27,3166.52 3468.85,3166.52 3468.85,3183.01 3441.99,3183.01 3352.06,3272.94 3353.41,3272.93 3353.41,3415 3466.92,3496.36 3595,3496.25 3594.08,3787.65 3381.03,3783.52 3381.03,3885.83 3684,3877.57 3684,3656.16
PHASE_A on Top Layer "PHASE_A_L01_P195" (solid, pour order 195): 4933.07,2791.34 5188.98,2791.34 5188.98,2531.5 4933.07,2531.5
PHASE_B on Top Layer "PHASE_B_L01_P194" (solid, pour order 194): 4944.88,3003.94 5188.98,3003.94 5190,3002.91 5190,2800 4944.88,2800
PHASE_C on Top Layer "PHASE_C_L01_P193" (solid, pour order 193): 4968.5,3200.79 5196.85,3200.79 5196.85,3015.75 5192.91,3011.81 4968.5,3015.75
GND on Top Layer "GND_L01_P192" (solid, pour order 192): 4985,3724.41 4985,3672.48 4985,3435 5190.98,3435 5188.98,3437.01 5188.98,3724.41
3V3 on Top Layer "3V3_L01_P191" (solid, pour order 191): 3596.08,3873.28 3596.08,3735.7 3669.29,3735.7 3669.29,3873.47
GND on Top Layer "GND_L01_P190" (solid, pour order 190): 3314.96,3944.88 3314.96,3688.98 3630,3688.98 3630,3944.88
GND on Top Layer "GND_L01_P173" (solid, pour order 173): 2979.65,2240.51 3079.78,2240.51 3079.78,2472.46 2987.5,2575 2917.57,2575 2917.57,2240.51
NetNT_SPB_2 on Top Layer "NETNT_SPB_2_L01_P152" (solid, pour order 152): 4165.35,3260 4510,3260 4510,3115 4304.9,3115 4304.9,3129.96 4165.35,3129.96
GND on Top Layer "GND_L01_P155" (solid, pour order 155): 4129.92,3086.61 4342.52,3086.61 4342.52,2831.97 4129.92,2831.97
3V3 on Top Layer "3V3_L01_P174" (solid, pour order 174): 3595.75,3460.12 3595.75,3435 3515,3435 3515,3400 3670,3400 3670,3767.72 3595.54,3767.72
VBATT on Top Layer "VBATT_L01_P150" (solid, pour order 150): 4401.24,3525 4579.61,3525 4605,3501.46 4605,3295.28 4320.75,3295.28 4320.75,3437.01 4401.24,3437.01
GND on Top Layer "GND_L01_P180" (solid, pour order 180): 4000,2763.78 4228.35,2763.78 4228.35,2566.93 4000,2566.93
NetNT_SPA_2 on Top Layer "NETNT_SPA_2_L01_P178" (solid, pour order 178): 3991.64,2531.5 4228.35,2531.5 4226.69,2358.27 3991.64,2358.27
NetNT_SPA_2 on Top Layer "NETNT_SPA_2_L01_P156" (solid, pour order 156): 4240.16,2760 4515,2760 4515,2615 4390,2615 4390,2590.55 4240.16,2590.55
VBATT on Top Layer "Top Layer-VBATT 1" (solid, pour order 161): 4937.13,2161.63 4937.13,2316.28 4622.05,2316.28 4622.05,2555.12 4342.52,2555.12 4342.52,2161.63
GND on Top Layer "Top Layer-GND 1" (solid, pour order 168): 3268.74,2425.2 3433.85,2425.2 3433.85,2730 3433.85,2865 3345,2865 3345,3012.51 3469.97,3012.51 3469.97,3022.18 3185,3022.18 3185,2967.3 3057.15,2968.62 2907.02,2967.66 2907.02,2612.88 2970.61,2612.88 3217.34,2366.14 3268.14,2366.14
VBATT on Top Layer "VBATT_L01_P154" (solid, pour order 154): 4352.36,3062.99 4538.24,3062.99 4605,3001.09 4605,2830 4352.36,2830
GND on Top Layer "GND_L01_P151" (solid, pour order 151): 4129.92,3437.01 4289.25,3437.01 4289.25,3318.9 4129.92,3318.9
NetNT_SPC_2 on Top Layer "NETNT_SPC_2_L01_P148" (solid, pour order 148): 4308.32,3760 4510,3760 4510,3618.11 4509.89,3618.11 4385.19,3617.46 4385.19,3488.59 4083.91,3487.8 4083.91,3612.03 4307.6,3612.03
VBATT on Top Layer "Top Layer-VBATT" (solid, pour order 147): 3437.01,2362.2 3580,2362.2 3580,2600 3580,3006.56 3548.38,3006.56 3548.38,2953.87 3522.67,2929.28 3522.67,2910.03 3548.38,2910.03 3548.38,2830 3460,2830 3460,2600 3459.6,2600 3459.6,2417.33 3437.01,2417.31
PHASE_B on Top Layer "PHASE_B_L01_P153" (solid, pour order 153): 4520,3265 4520,3085 4635.46,3085 4689.89,3035 4689.89,2985 4610,2985 4610,2800 4949.14,2800 4988.19,2800 4988.19,3002.67 4858.27,3002.67 4858.27,3265
PHASE_A on Top Layer "PHASE_A_L01_P157" (solid, pour order 157): 4525,2790 4525,2585 4640.46,2585 4694.89,2535 4694.89,2485 4633.86,2485 4633.86,2330 5190,2330 5190,2560 4960,2560 4960,2790
PHASE_C on Top Layer "PHASE_C_L01_P149" (solid, pour order 149): 4520,3760 4520,3585 4635.46,3585 4689.89,3535 4689.89,3485 4610,3485 4610,3270 4870.08,3270 4870.08,3015.75 4985,3015.75 4985,3220 4985,3650 4725,3650 4725,3760
SPB on Top Layer "SPB_L01_P113" (solid, pour order 113): 2765,1565 2765,1563.69
VBATT on Top Layer "VBATT_L01_P162" (solid, pour order 162): 4673.23,3890 4920,3890 4920,3770 4673.23,3770
GND on Bottom Layer "GND_L02_P189" (solid, pour order 189): 4728.35,3740.16 5091.56,3740.16 5093.81,3737.91 5093.81,3438.68 4730.61,3438.68 4728.35,3440.94
VBATT on Bottom Layer "VBATT_L02_P188" (solid, pour order 188): 4960.63,3208.66 5188.98,3208.66 5188.98,3440.94 5192.91,3444.88 4960.63,3444.88
VBATT on Bottom Layer "VBATT_L02_P184" (solid, remove dead copper, pour order 184): 4669.29,3968.5 5197.8,3968.5 5197.8,3409.45 4967.18,3409.45 4967.18,2766.01 4410.79,2212.6 3988.19,2215.5 3988.19,2374.02 3507.87,2374.02 3507.87,2547.24 4055.12,2547.24 4055.12,2354.28 4472.44,2354.28 4472.44,3438.68 5093.81,3438.68 5092.66,3749.17 4669.29,3749.17
GND on Bottom Layer "GND_L02_P187" (solid, pour order 187): 2874.02,2224.62 2874.02,2086.61 3007.87,2086.61 3007.87,2224.17
GND on Bottom Layer "Bottom Layer-GND" (solid, pour order 185): 3972.44,2598.43 4242.63,2598.43 4242.63,2700.79 4476.38,2700.79 4476.38,3266.34 4511.81,3266.34 4511.81,3448.82 4803.15,3448.82 4803.15,3748.03 4375.86,3748.03 4375.86,3842.08 4085.82,3842.08 4085.82,3582.3 4622.05,3578.74 4622.19,3525.3 4401.57,3525.3 4313.35,3433.07 4129.92,3433.07 4129.92,3267.72 4074.8,3267.72 4074.8,2783.46 3972.44,2783.46
GND on Bottom Layer "GND_L02_P186" (solid, remove dead copper, pour order 186): 2874.02,2334.65 2874.02,2216.98 3507.87,2216.98 3617.71,2217.56 3617.71,2351.14 3507.87,2351.14 3507.87,2952.76 3686.11,2952.76 3686.11,3287.05 3484.25,3287.05 2874.02,2681.29
NetNT_SPA_2 on Bottom Layer "NETNT_SPA_2_L02_P179" (solid, pour order 179): 4236.22,2696.85 4236.22,2496.06 4059.06,2496.06 4059.06,2358.27 4381.89,2358.27 4381.89,2696.85
no net on Layer0 "Default Coverlay 1 Top" (split plane): 2464.57,1775.59 2464.57,3992.13 5212.6,3992.13 5212.6,1775.59
no net on Layer0 "Default Coverlay 1 Bottom" (split plane): 2464.57,1775.59 2464.57,3992.13 5212.6,3992.13 5212.6,1775.59

## Keep-outs
Keep-Out Layer:
  the board outline again, w10

## Silkscreen, mask and mechanical layers (free items; w line width, h text height)
Top Overlay:
  drawing of 22 lines, arcs and shapes, not listed
  text "GND" at 4851.77,3510.43 h32.99 r90
  text "VBATT" at 4851.77,3254.53 h32.99 r90
  text "C" at 4859.65,3061.61 h32.99 r90
  text "B" at 4859.65,2860.83 h32.99 r90
  text "A" at 4859.65,2660.04 h32.99 r90
  text "5V" at 2813.58,2041.93 h32.99
  text "GND" at 2908.07,2041.93 h32.99
  text "2021-08-08" at 3364.33,1911.57 h60
  text "Test Rig Power Board Rev.1" at 2486.38,1813.46 h60
Bottom Overlay:
  text "Ellen Wang" at 3060.87,1817.4 h60

## Text inside footprints (layer, text, board x,y; h text height)
P2: Top Overlay "2" at 2565,2045 h32.99 r90; Top Overlay "1" at 2665,2045 h32.99 r90; Top Overlay "35" at 2669.29,3913.39 h32.99 r90; Top Overlay "36" at 2566.93,3913.39 h32.99 r90